# Altium PCB PCB2.PcbDoc
Units mm, origin at the board's own origin, x right, y up, seen from the top; angles counter-clockwise.
Board outline 77 x 49 mm, 2 copper layers (Top Layer, Bottom Layer); 56 components, 52 nets, 226 pads, 40 vias.
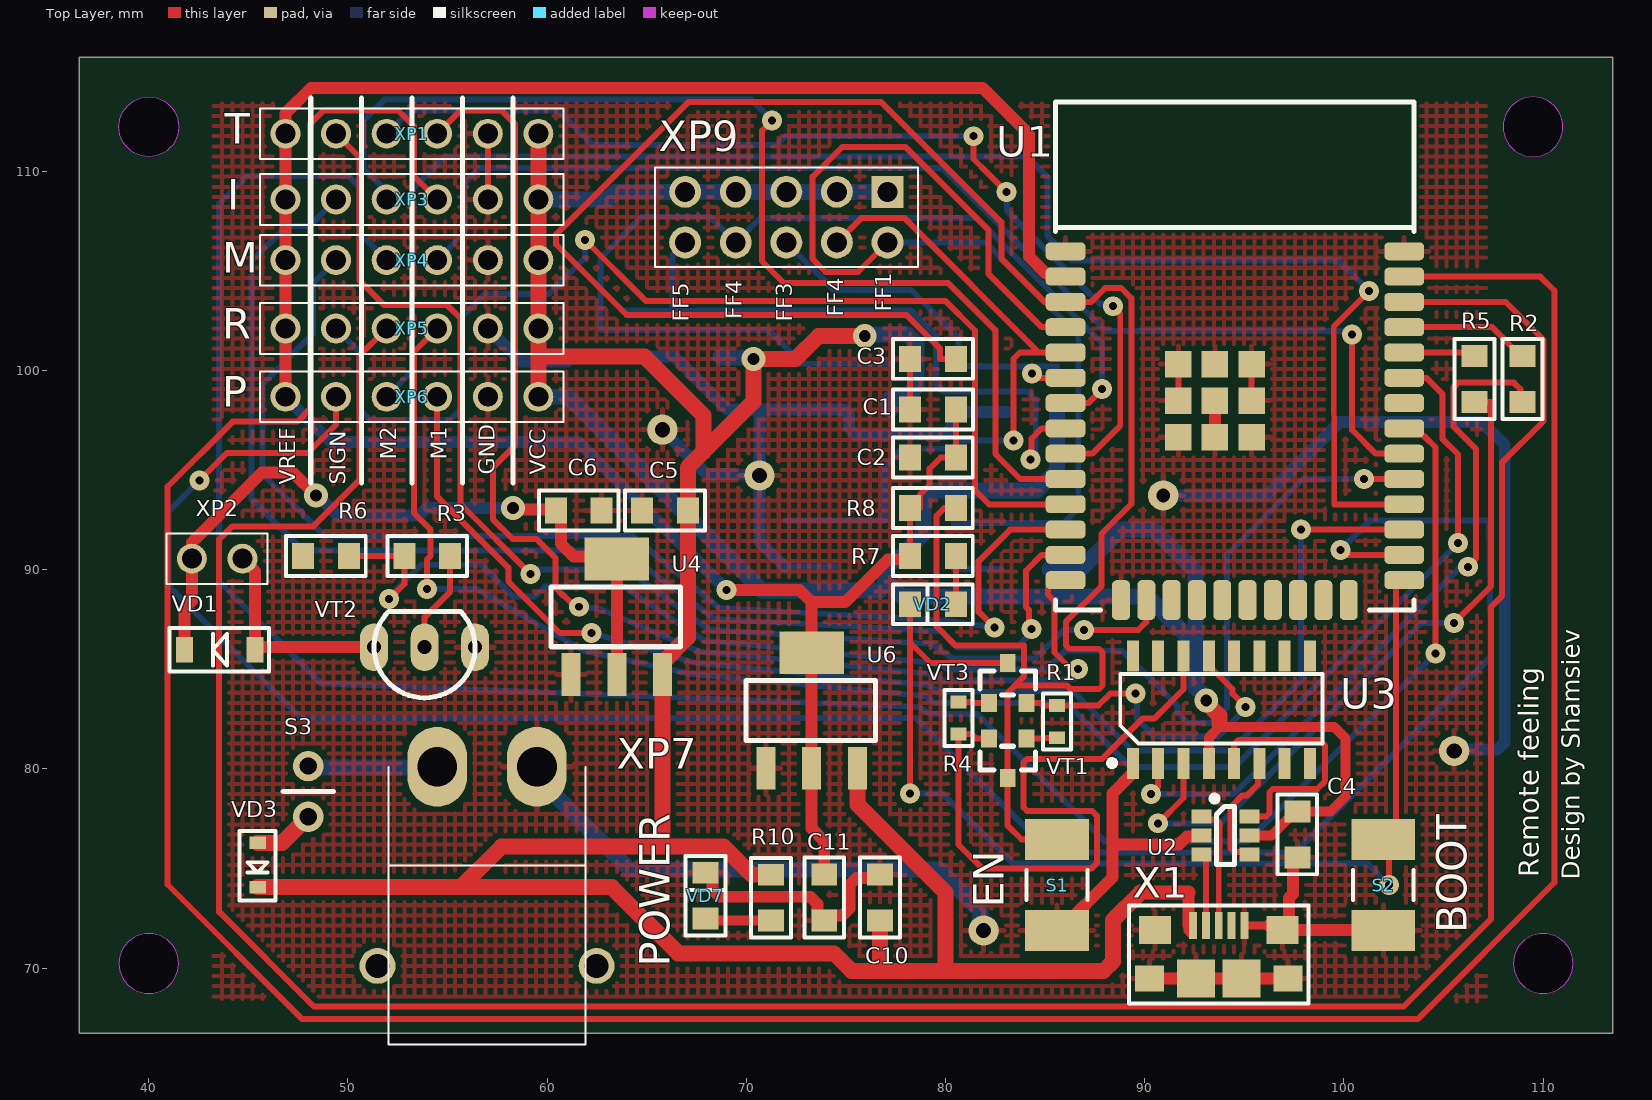
[diagram p0: Top Layer view]
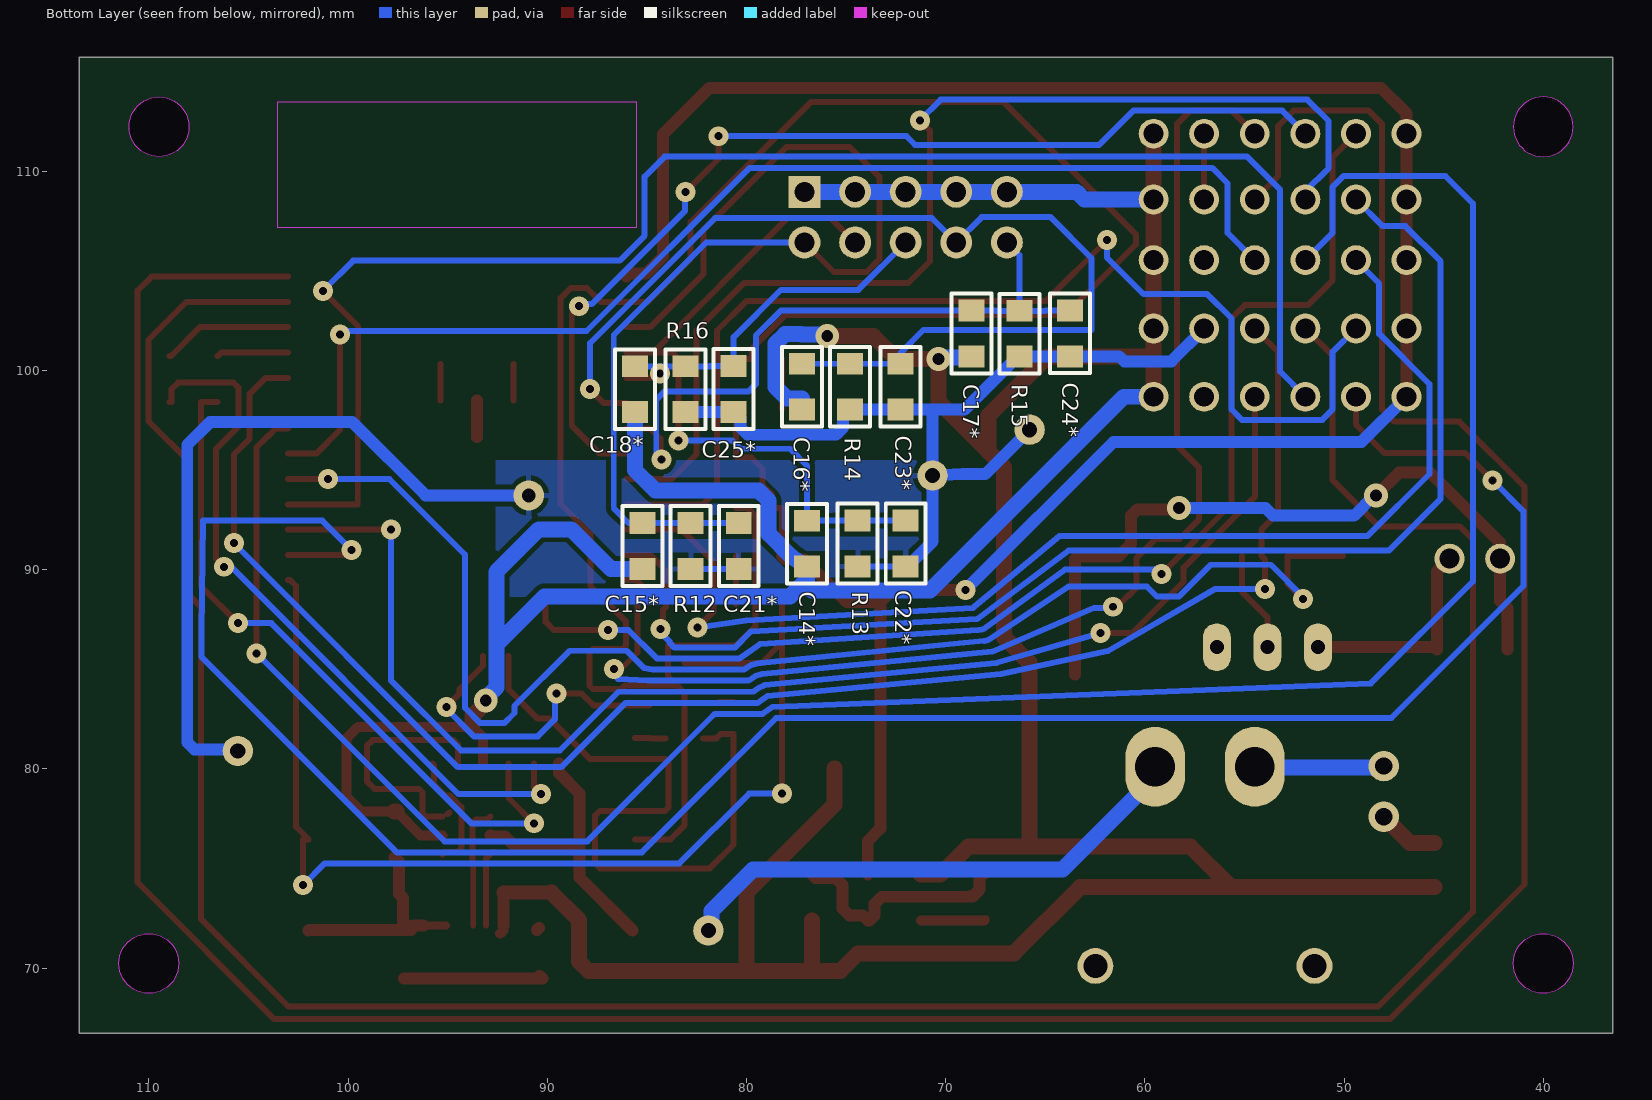
[diagram p1: Bottom Layer view, seen from below]
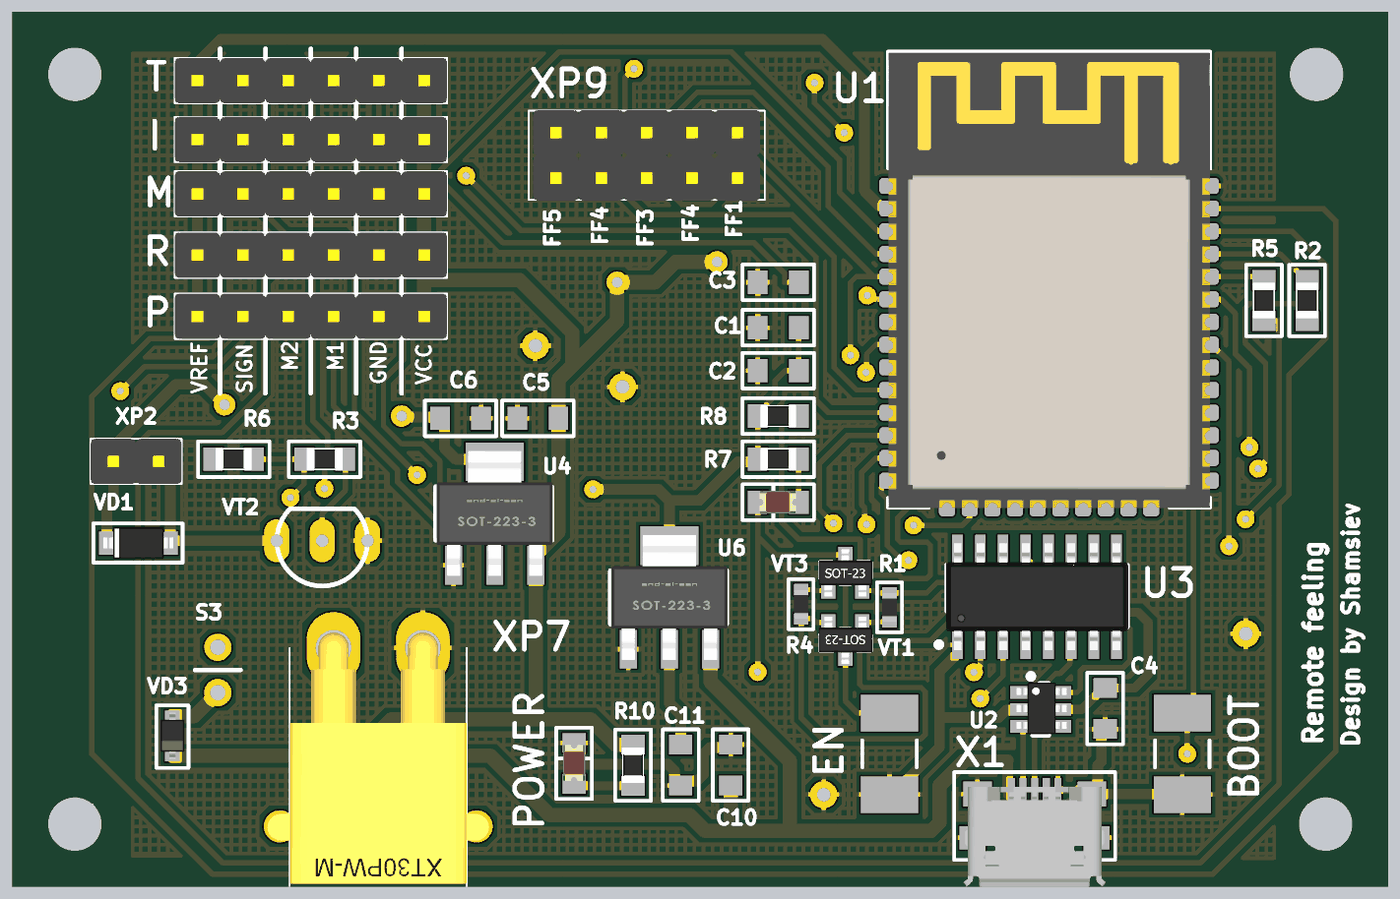
[diagram p2: 3D render of the assembled board from above, using the file's embedded part models]

## Layer stack, top to bottom
Top Solder: solder mask 0.0102, Solder Resist, Dk 3.5
Top Layer: signal copper 0.0356
Dielectric 1: dielectric 0.32, FR-4, Dk 4.8
Bottom Layer: signal copper 0.0356
Bottom Solder: solder mask 0.0102, Solder Resist, Dk 3.5

## Board outline
36.505,66.731 36.505,115.731 113.505,115.731 113.505,66.731
cut-out: 40.005,110.731 cw(c40.005,112.231) 38.505,112.231 cw(c40.005,112.231) 40.005,113.731 cw(c40.005,112.231) 41.505,112.231 cw(c40.005,112.231)
cut-out: 107.997,112.231 ccw(c109.497,112.231) 109.497,110.731 ccw(c109.497,112.231) 110.997,112.231 ccw(c109.497,112.231) 109.497,113.731 ccw(c109.497,112.231)
cut-out: 108.505,70.231 ccw(c110.005,70.231) 110.005,68.731 ccw(c110.005,70.231) 111.505,70.231 ccw(c110.005,70.231) 110.005,71.731 ccw(c110.005,70.231)
cut-out: 38.505,70.231 ccw(c40.005,70.231) 40.005,68.731 ccw(c40.005,70.231) 41.505,70.231 ccw(c40.005,70.231) 40.005,71.731 ccw(c40.005,70.231)

## Design rules (kind name [scope] priority, off if disabled: settings)
Clearance Clearance_1 [All] p1: gap=0.254 ignorepadtopadclearanceinfootprint=TRUE except(0: Arc-Hole Track-Hole SMDPad-Hole THPad-Hole Via-Hole Fill-Hole Poly-Hole Region-Hole Text-Hole)
Clearance [All] p2: gap=0.254 ignorepadtopadclearanceinfootprint=FALSE except(0: Arc-Hole Track-Hole SMDPad-Hole THPad-Hole Via-Hole Fill-Hole Poly-Hole Region-Hole Text-Hole; 0.1: SMDPad-SMDPad)
PolygonConnect [All] p1: connectstyle=Relief reliefconductorwidth=0.254 reliefentries=4 polygonreliefangle="90 Angle" airgapwidth=0.254
RoutingVias [All] p1: holewidth=0.4 width=1 viastyle="Through Hole" minholewidth=0.4 minwidth=0.8 maxholewidth=0.6 maxwidth=1
SolderMaskExpansion [All] p1: expansion=0.102 istentingtop=FALSE
Width Width_3 [InNet('FR1')] p1: maxlimit=1 minlimit=0.5 preferedwidth=0.8
Width Width_4 [All] p2: maxlimit=1 minlimit=0.254 preferedwidth=0.3
Width Width_2 [InNet('BAT')] p3: maxlimit=1 minlimit=0.6 preferedwidth=0.8
Width Width_1 [InNet('3V3')] p4: maxlimit=1 minlimit=0.6 preferedwidth=0.6
Width [InNet('3V')] p5: maxlimit=1 minlimit=0.6 preferedwidth=0.6
30 further rules are at their usual default settings.

## Components (designator, comment, footprint, x,y, rotation, side; value= is the part's Value field where it differs from the comment)
C1 "100uF" C0805 79.375,98.044 r180 top
C2 "100nF" C0805 79.368,95.631 r180 top
C3 "100nF" C0805 79.375,100.584 r180 top
C4 "100nF" C0805 97.663,76.708 r270 top
C5 "10uF" C0805 65.92,92.964 r0 top
C6 "10uF" C0805 61.588,92.964 r180 top
C10 "10uF" C0805 76.708,73.54 r270 top
C11 "10uF" C0805 73.914,73.54 r90 top
C14* "100n" C0805 76.962,91.306 r90 bottom
C15* "100n" C0805 85.217,91.186 r90 bottom
C16* "100n" C0805 77.216,99.187 r90 bottom
C17* "100n" C0805 68.707,101.854 r90 bottom
C18* "100n" C0805 85.598,99.06 r90 bottom
C21* "100n" C0805 80.391,91.186 r270 bottom
C22* "100n" C0805 72.009,91.313 r270 bottom
C23* "100n" C0805 72.263,99.187 r270 bottom
C24* "100n" C0805 63.754,101.861 r270 bottom
C25* "100n" C0805 80.645,99.067 r270 bottom
R1 "10K" R0603 85.598,82.375 r90 top
R2 "470" R0805 108.966,99.568 r90 top
R3 "1K" R0805 53.982,90.678 r180 top
R4 "10K" R0603 80.645,82.55 r270 top
R5 "470" R0805 106.553,99.568 r90 top
R6 "10K" R0805 48.895,90.678 r0 top
R7 "2K" R0805 79.368,90.678 r0 top
R8 "10K" R0805 79.368,93.091 r0 top
R10 "2K" R0805 71.247,73.533 r270 top
R12 "100K" R0805 82.804,91.186 r90 bottom
R13 "100K" R0805 74.422,91.313 r90 bottom
R14 "100K" R0805 74.803,99.187 r90 bottom
R15 "100K" R0805 66.294,101.847 r90 bottom
R16 "100K" R0805 83.058,99.06 r90 bottom
S1 "EN" SW4*3 85.598,74.168 r90 top
S2 "BOOT" SW4*3 101.981,74.168 r90 top
S3 "POWER" Key 46.736,78.867 r270 top
U1 "ESP32-WROOM-32E" ESP32-WROOM-32E 94.529,98.482 r0 top
U2 "USB LC6" SOT-23-6 94.107,76.708 r270 top
U3 "CH340C" SO-16 93.858,83.014 r90 top
U4 "AMS1117" SOT-223 63.5,87.63 r0 top
U6 "AMS1117" SOT-223 73.279,82.931 r0 top
VD1 "1N4148W" SOD-123 45.339,85.979 r180 top
VD2 "/" D0805 79.343,88.265 r180 top
VD3 "B5819WS" SOD-323 45.466,75.184 r270 top
VD7 "POWER" D0805 67.945,73.66 r90 top
VT1 "S8050(NPN)" SOT-23-3 83.124,79.534 r180 top
VT2 "2N7000" TO-92 53.848,86.106 r270 top
VT3 "S8050(NPN)" SOT-23-3 83.124,85.312 r0 top
X1 "47346-0001 (Molex, Micro USB)" microUSB-B 93.719,72.144 r90 top
XP1 "T_SERV1" PLS-6 53.213,111.887 r180 top
XP2 "VIBRO_M" PLS-2 43.434,90.551 r0 top
XP3 "I_SERV2" PLS-6 53.213,108.585 r180 top
XP4 "M_SERV3" PLS-6 53.213,105.537 r180 top
XP5 "R_SERV4" PLS-6 53.213,102.108 r180 top
XP6 "P_SERV5" PLS-6 53.213,98.679 r180 top
XP7 "XT30PW-M" XT30PW-M 56.984,75.104 r180 top
XP9 "FInger_force" PLD-10 72.009,107.696 r270 top

## Footprints (in the part's own frame and the unit in brackets; to place one, negate y for a bottom-side part, rotate by r counter-clockwise, add the part's x,y. Pads: shape width x height; smd on the part's side, far side on the other; paste and mask are expansions set on the pad)
C0805 [mm]
  rect 1.1x1.3 smd: 1(-1.15,0) 2(1.15,0)
  silkscreen extent -2,-1 2,1, body extent -1,-0.62 1,0.63, height 0.7
D0805 [mm]
  rect 1.1x1.3 smd: 1(-1.175,0) 2(1.125,0)
  silkscreen extent -2.02,-1 1.98,1, body extent -1.01,-0.62 1.01,0.62, height 1.1
ESP32-WROOM-32E [mm] "PCB ANTENNA - 38 PIN"
  rrect50% 2x0.9 smd: 1(-8.5,7.5) 2(-8.5,6.23) 3(-8.5,4.96) 4(-8.5,3.69) 5(-8.5,2.42) 6(-8.5,1.15) 7(-8.5,-0.12) 8(-8.5,-1.39) 9(-8.5,-2.66) 10(-8.5,-3.93) 11(-8.5,-5.2) 12(-8.5,-6.47) 13(-8.5,-7.74) 14(-8.5,-9.01) 25(8.5,-9.01) 26(8.5,-7.74) 27(8.5,-6.47) 28(8.5,-5.2) 29(8.5,-3.93) 30(8.5,-2.66) 31(8.5,-1.39) 32(8.5,-0.12) 33(8.5,1.15) 34(8.5,2.42) 35(8.5,3.69) 36(8.5,4.96) 37(8.5,6.23) 38(8.5,7.5)
  rrect50% 0.9x2 smd: 15(-5.715,-10.01) 16(-4.445,-10.01) 17(-3.175,-10.01) 18(-1.905,-10.01) 19(-0.635,-10.01) 20(0.635,-10.01) 21(1.905,-10.01) 22(3.175,-10.01) 23(4.445,-10.01) 24(5.715,-10.01)
  rect 1.33x1.33 smd: 39(-2.835,-1.835) 39(-2.835,0) 39(-2.835,1.835) 39(-1,-1.835) 39(-1,0) 39(-1,1.835) 39(0.835,-1.835) 39(0.835,0) 39(0.835,1.835)
  Keep-Out Layer region: -9,8.69 9,8.69 9,15 -9,15
  silkscreen extent -9,-10.5 9,15, body extent -9,-10.54 9,14.96, height 3.2
Key [mil]
  round 60 hole 33.94: 1(-50,50) 2(50,50)
  silkscreen extent 0,0 0,100
microUSB-B [mm]
  rect 1.35x0.4 smd paste+0: 1(0,1.3) 2(0,0.65) 3(0,0) 4(0,-0.65) 5(0,-1.3)
  rect 1.3x1.45 smd paste+0: 6(-2.675,3.475) 6(-2.675,-3.475)
  rect 1.9x1.9 smd paste+0: 6(-2.675,-1.15)
  rect 1.9x1.9 smd: 6(-2.675,1.15)
  rect 1.4x1.6 smd paste+0: 6(-0.225,3.2) 6(-0.225,-3.2)
  silkscreen extent -3.93,-4.5 1,4.5, body extent -5.43,-4 0.18,4, height 2.74
PLD-10 [mm]
  rect 1.6x1.6 hole 1: 1(-1.27,5.08)
  round 1.6 hole 1: 2(1.27,5.08) 3(-1.27,2.54) 4(1.27,2.54) 5(-1.27,0) 6(1.27,0) 7(-1.27,-2.54) 8(1.27,-2.54) 9(-1.27,-5.08) 10(1.27,-5.08)
  silkscreen extent -2.5,-6.6 2.5,6.6, body extent -2.54,-6.35 2.54,6.35, height 8.54
PLS-2 [mm]
  round 1.5 hole 1: 1(-1.27,0) 2(1.27,0)
  silkscreen extent -2.54,-1.27 2.54,1.27, body extent -2.54,-1.27 2.54,1.27, height 8.54
PLS-6 [mm]
  round 1.5 hole 1: 1(-6.35,0) 2(-3.81,0) 3(-1.27,0) 4(1.27,0) 5(3.81,0) 6(6.35,0)
  silkscreen extent -7.62,-1.27 7.62,1.27, body extent -7.62,-1.27 7.62,1.27, height 8.54
R0603 [mm]
  rect 0.65x0.8 smd: 1(-0.815,0) 2(0.81,0)
  silkscreen extent -1.4,-0.7 1.4,0.7, body extent -0.8,-0.4 0.8,0.4, height 0.47
R0805 [mm]
  rect 1.1x1.3 smd: 1(-1.15,0) 2(1.15,0)
  silkscreen extent -2,-1 2,1, body extent -1,-0.62 1,0.62, height 0.5
SO-16 [mm]
  rect 1.55x0.6 smd: 1(-2.75,4.45) 2(-2.75,3.18) 3(-2.75,1.91) 4(-2.75,0.64) 5(-2.75,-0.63) 6(-2.75,-1.9) 7(-2.75,-3.17) 8(-2.75,-4.44) 9(2.65,-4.44) 10(2.65,-3.17) 11(2.65,-1.9) 12(2.65,-0.63) 13(2.65,0.64) 14(2.65,1.91) 15(2.65,3.18) 16(2.65,4.45)
  silkscreen extent -2.87,-5.08 1.75,5.65, body extent -3.05,-5.1 2.95,5.1, height 1.7
SOD-123 [mm] "SOD-123 diode package"
  rect 0.85x1.3 smd: 1(0,0) 2(3.55,0)
  silkscreen extent -0.7,-1.1 4.3,1.1, body extent -0.18,-0.9 3.72,0.9, height 1.18
SOD-323 [mm]
  rect 0.63x0.83 smd: 1(-1.1,0) 2(1.125,0)
  silkscreen extent -1.7,-0.9 1.8,0.9, body extent -1.3,-0.68 1.3,0.68, height 1.1
SOT-23-3 [mm]
  rect 0.8x0.9 smd: 1(-0.95,-2) 2(0.95,-2) 3(0,0)
  silkscreen extent -1.4,-1.6 1.4,-0.4, body extent -1.5,-2.32 1.5,0.32, height 1.08
SOT-23-6 [mm]
  rect 0.7x1 smd: 1(-0.9,-1.25) 2(0.05,-1.25) 3(1,-1.25) 4(1,1.15) 5(0.05,1.15) 6(-0.9,1.15)
  silkscreen extent -1.95,-0.75 1.5,0.4, body extent -1.45,-1.4 1.45,1.4, height 1.45
SOT-223 [mm]
  rect 0.95x2.15 smd: 1(-2.3,-2.9) 2(0,-2.9) 3(2.3,-2.9)
  rect 3.25x2.15 smd: 2(0,2.9)
  silkscreen extent -3.3,-1.5 3.2,1.5, body extent -3.25,-3.5 3.25,3.5, height 1.7
SW4*3 [mm]
  rect 2.05x3.2 smd: 1(-2.286,0) 2(2.286,0)
  silkscreen extent -0.76,-1.52 0.76,1.52, body extent -2.5,-1.5 2.5,1.5, height 1
TO-92 [mm]
  oval 2.4x1.4 hole 0.7: 1(0,2.54) 2(0,0) 3(0,-2.54)
  silkscreen extent -1.8,-2.54 2.54,2.54
XT30PW-M [mm]
  oval 3x4 hole 2: 1(-2.5,-5) 2(2.5,-5)
  round 1.8 hole 1.2: K1(-5.5,5) K2(5.5,5)
  silkscreen extent -4.95,-5 4.95,8.95, body extent -6.2,-5.85 6.2,8.2, height 5.01

## Part data
C1 C2 C3 C4 C5 C6 C10 C11 C14* C15* C16* C17* C18* C21* C22* C23* C24* C25*: library part Cap
R1 R2 R3 R4 R5 R6 R7 R8 R10 R12 R13 R14 R15 R16: library part res
S1 S2 S3: library part Key
U1: "PCB Antenna - 4,8,16 MB Flash - WiFi - BT - MCU", Manufacturer_Name="Espressif Systems", ComponentLink1Description=Datasheet, ComponentLink1URL=https://www.espressif.com/sites/default/files/documentation/esp32-wroom-32e_esp32-wroom-32ue_datasheet_en.pdf, ComponentLink2Description="SoC Datasheet", ComponentLink2URL=https://www.espressif.com/sites/default/files/documentation/esp32_datasheet_en.pdf, ComponentLink3Description=Devkit, ComponentLink3URL=https://www.espressif.com/en/products/devkits/esp32-devkitc
VD1: library part VD
VD2 VD7: library part Led
VD3: library part "Schottky diode"
VT1 VT3: library part npn
VT2: library part "MOSFET (N-Channel)"
XP1 XP3 XP4 XP5 XP6: library part PLS-6, "PLS-6"
XP2: library part PLS-2, "PLS-2"
XP9: library part PLD-10, "PLD-10"

## Free pads (board coordinates)
  round 1.524 hole 0.7: 2(90.932,93.726)
  round 1.524 hole 0.762: 6(65.786,97.028) 7(70.658,94.725) 8(105.537,80.899) 10(81.915,71.882)

## Via types
v1: diameter 1, hole 0.4, Top Layer to Bottom Layer, 35 vias
v2: diameter 1.2, hole 0.6, Top Layer to Bottom Layer, 5 vias

## Nets (pads, with @x,y where several pads share a name; then routed paths per layer and width w, separated by ;. In a path a pad name is that pad's centre, name@x,y a point inside that pad or via, vN(x,y) a via of type N, cw(c..) or ccw(c..) an arc to the next point about the centre after c; other vN are vias at no path point)
3V: C6.2 U4.2 VD1.2 XP2.1 | length 37.1
  Top Layer w0.6: VD1.2 41.789,88.062 42.164,88.437 XP2.1 42.164,91.359 45.674,94.869 47.244,94.869 v2(48.387,93.726) ; v2(58.293,93.091) 58.356,93.027 60.374,93.027 60.688,92.714 60.688,91.31 61.326,90.672 63.358,90.672 63.5,90.53 U4.2@63.5,84.73
  Bottom Layer w0.6: v2(48.387,93.726) 48.476,93.726 49.492,92.71 53.559,92.71 53.94,93.091 v2(58.293,93.091)
3V3: C1.1 C2.1 C11.2 R7.1 R8.1 U1.2 U6.2 XP1.6 XP3.6 XP4.6 XP5.6 XP6.6 | length 120.8
  Top Layer w0.3: R7.1 R8.1 78.715,93.091 78.715,93.751 79.197,94.234 79.197,95.072 79.756,95.631 C2.1 80.518,96.825 80.525,96.832 C1.1
  Top Layer w0.6: XP6.6 XP5.6 XP4.6 XP3.6 XP1.6 46.863,112.903 48.151,114.191 81.859,114.191 84.201,111.849 84.201,105.708 85.047,104.862 85.879,104.862 U1.2 ; v1(69.005,88.983) 72.663,88.983 73.279,88.367 74.964,88.367 77.119,90.522 78.062,90.522 R7.1 ; 73.279,88.138 73.279,85.831 73.279,80.031 73.279,77.008 73.914,76.373 C11.2
  Bottom Layer w0.6: XP6.6 49.124,96.418 61.57,96.418 v1(69.005,88.983)
+12: 
BAT: S3.1 XP7.2 | length 6.6
  Bottom Layer w0.8: S3.1 48.071,80.072 54.508,80.072 XP7.2@54.523,80.057
DTR: R1.2 U3.13 VT3.2 | length 16.9
  Top Layer w0.3: VT3.2 84.76,83.312 84.887,83.185 87.679,83.185 88.271,83.777 v1(89.535,83.777) ; U3.13 93.218,85.189 94.401,84.006 94.401,83.794 95.052,83.143 v1(95.052,83.101)
  Bottom Layer w0.3: v1(89.535,83.777) 89.621,83.691 89.621,82.489 90.475,81.636 93.685,81.636 95.052,83.002 v1(95.052,83.101)
EN: C3.1 R8.2 S1.2 U1.3 VT1.3 | length 111.3
  Top Layer w0.3: R8.2 79.934,93.091 79.553,92.71 79.553,87.147 80.518,86.182 83.947,86.182 83.947,84.643 83.48,84.176 ; C3.1 79.731,100.584 79.731,101.092 78.029,102.794 63.983,102.794 60.452,106.324 60.452,106.832 67.107,113.487 76.759,113.487 82.804,107.442 82.804,105.601 84.963,103.442 U1.3 87.313,103.442 88.011,104.14 88.824,104.14 89.332,103.632 89.332,93.294 87.833,91.796 87.833,89.169 86.04,87.376 86.04,86.206 86.216,86.03 87.706,86.03 87.884,85.852 87.884,84.174 87.708,83.998 86.284,83.998 86.106,84.176 83.48,84.176 ; S1.2 83.82,76.454 83.124,77.15 VT1.3 83.124,83.82 83.48,84.176
FF1: C15*.2 C21*.1 R12.2 U1.4 XP9.2 | length 53.9
  Top Layer w0.3: XP9.2 75.606,104.943 73.975,104.943 73.33,105.588 73.33,109.728 74.828,111.227 77.982,111.227 82.169,107.039 82.169,104.839 84.836,102.172 U1.4
  Bottom Layer w0.3: XP9.2 82.021,106.426 86.665,101.782 86.665,93.079 85.922,92.336 C15*.2 R12.2 C21*.1
FF2: C14*.2 C22*.1 R13.2 U1.5 XP9.4 | length 35
  Top Layer w0.3: XP9.4 75.768,107.645 77.947,107.645 84.69,100.902 ; v1(83.414,96.495) 83.414,100.584 83.732,100.902 84.69,100.902 ; U1.5 84.69,100.902
  Bottom Layer w0.3: C22*.1 R13.2 75.667,92.463 75.674,92.456 C14*.2 76.962,95.225 77.807,96.07 80.303,96.07 80.728,96.495 v1(83.414,96.495)
FF3: C18*.2 C25*.1 R16.2 U1.6 XP9.6 | length 19.3
  Top Layer w0.3: v1(84.353,99.847) 84.569,99.632 U1.6
  Bottom Layer w0.3: XP9.6 74.385,104.05 78.271,104.05 80.645,101.676 C25*.1 81.839,100.217 81.846,100.21 R16.2 84.716,100.21 ; v1(84.353,99.847) 84.716,100.21 ; C18*.2 84.716,100.21
FF4: C16*.2 C23*.1 R14.2 U1.7 XP9.8 | length 53.3
  Top Layer w0.3: U1.7 87.161,98.362 v1(87.859,99.06)
  Bottom Layer w0.3: C16*.2 R14.2 C23*.1 72.263,100.889 71.12,102.032 62.687,102.032 62.687,105.649 64.734,107.696 68.199,107.696 XP9.8 70.688,107.645 81.585,107.645 87.859,101.371 v1(87.859,99.06)
FF5: C17*.2 C24*.1 R15.2 U1.8 XP9.10 | length 33.9
  Top Layer w0.3: v1(84.277,95.529) 84.328,95.58 84.328,96.584 84.836,97.092 U1.8
  Bottom Layer w0.3: C24*.1 64.999,103.011 65.013,102.997 R15.2 ; XP9.10 66.294,105.791 R15.2 ; v1(84.277,95.529) 84.531,95.783 84.531,98.527 84.125,98.933 79.908,98.933 79.527,99.314 79.527,101.752 78.276,103.004 C17*.2 67.495,103.004 67.488,102.997 R15.2
FR1: C4.1 C5.2 C10.2 C14*.1 C15*.1 C16*.1 C17*.1 C18*.1 R10.1 U2.5 U3.4 U4.3 U6.3 VD3.2 X1.1 XP1.1 XP3.1 XP4.1 XP5.1 XP6.1 XP9.1 XP9.3 XP9.5 XP9.7 XP9.9 | length 256.9
  Top Layer w0.5: 92.202,72.144 92.202,71.886 X1.1@92.365,71.723 ; U3.4 93.218,81.565 93.75,82.097 99.513,82.097 100.076,81.534 100.076,78.613 99.321,77.858 C4.1 ; U2.5 96.363,76.658 C4.1@97.563,77.858
  Top Layer w0.6: 92.202,72.144 92.202,73.787
  Top Layer w0.7: 89.789,73.787 92.202,73.787
  Top Layer w0.8: VD3.2 55.669,74.059 ; XP6.1 59.563,100.711 ; XP1.1 XP3.1 XP4.1 XP5.1 59.563,100.711 ; R10.1 70.282,74.683 68.866,76.098 65.8,76.098 ; U6.3 75.579,78.218 80.01,73.787 80.01,70.104 80.264,69.85 ; v2(75.946,101.727) 73.625,101.727 72.482,100.584 v2(70.358,100.584) 70.358,98.425 67.847,95.914 ; C10.2 76.708,69.85 ; 89.789,73.787 88.4,72.398 88.4,70.319 87.931,69.85 80.264,69.85 ; v2(93.091,83.439) 93.091,83.331 93.75,82.672 93.75,82.247 ; C4.1@97.563,77.858 C4.1 ; 55.669,74.059 63.253,74.059 66.573,70.739 74.401,70.739 75.29,69.85 76.708,69.85 ; 55.669,74.059 57.709,76.098 65.8,76.098 ; 59.563,100.711 64.886,100.711 67.847,97.75 67.847,95.914 ; 65.8,76.098 U4.3 65.8,85.33 67.07,86.6 C5.2 67.07,95.137 67.847,95.914 ; 76.708,69.85 80.264,69.85
  Bottom Layer w0.8: XP6.1 61.062,98.679 70.782,88.959 76.708,88.959 76.962,89.213 76.962,89.51 ; XP3.1 63.043,108.585 63.424,108.966 XP9.9 XP9.7 XP9.5 XP9.3 XP9.1 ; C17*.1 68.767,100.644 70.298,100.644 v2(70.358,100.584) ; v2(75.946,101.727) 76.023,101.804 77.243,101.804 77.268,101.829 78.068,101.829 78.537,101.36 78.537,99.162 77.978,98.603 77.216,98.603 C16*.1 ; C15*.1 86.81,90.036 88.798,92.024 90.424,92.024 92.558,89.891 92.558,86.233 ; C18*.1 85.598,94.996 84.582,93.98 79.4,93.98 78.892,93.472 78.892,91.796 77.749,90.653 C14*.1 76.962,89.51 ; v2(93.091,83.439) 93.091,83.547 92.558,84.081 92.558,86.233 ; 76.962,89.51 77.826,88.646 90.145,88.646 92.558,86.233
GND: C1.2 C2.2 C3.2 C4.2 C5.1 C6.1 C10.1 C11.1 C21*.2 C22*.2 C23*.2 C24*.2 C25*.2 pad.2 pad.6 pad.7 pad.8 pad.10 R12.1 R13.1 R14.1 R15.1 R16.1 S1.1 S2.1 U1.1 U1.15 U1.38 U1.39 U2.2 U3.1 U4.1 U6.1 VD7.2 VT2.1 X1.5 X1.6 XP1.2 XP3.2 XP4.2 XP5.2 XP6.2 XP7.1 | length 168.7
  Top Layer w0.3: XP3.2 XP1.2 ; C1.2 C3.2 ; U1.39@91.694,98.482 U1.39@91.694,100.317 ; U1.39@95.364,98.482 U1.39@95.364,100.317
  Top Layer w0.4: X1.5@95.096,72.144 X1.6@96.221,72.144
  Top Layer w0.6: VD7.2 68.045,74.785 68.295,74.535 68.295,73.94 68.646,73.589 68.824,73.589 68.834,73.579 73.213,73.579 73.564,73.228 73.564,72.64 73.814,72.39 C11.1 74.164,72.64 74.833,72.64 75.184,72.991 75.184,74.172 75.535,74.523 76.541,74.523 C10.1 ; S1.1@85.725,71.882 88.392,74.549 88.392,76.2 ; U3.1 89.408,79.789 88.392,78.773 88.392,76.2 ; X1.6@90.381,69.607 90.244,69.469 X1.6@97.194,69.469 ; X1.6@90.424,72.014 X1.6@90.519,71.919 ; U2.2 92.811,76.612 92.128,76.612 91.716,76.2 88.392,76.2 ; U1.39@93.529,96.647 U1.39@93.529,98.482 ; X1.6@96.221,72.144 X1.6@96.621,72.144 ; C4.2 97.455,75.35 97.455,73.727 97.246,73.519 97.246,72.319 X1.6@96.883,71.955 ; S2.1 101.944,71.919 96.919,71.919 X1.6@96.883,71.955 ; X1.6@96.621,72.144 96.694,72.144 X1.6@96.883,71.955 ; X1.6@96.621,72.144 96.846,71.919 X1.6@96.883,71.955
  Bottom Layer w0.3: C22*.2 R13.1 ; C21*.2 R12.1
  Bottom Layer w0.6: XP5.2 58.674,100.457 61.037,100.457 61.291,100.711 C24*.2 63.761,100.704 66.287,100.704 R15.1 66.394,100.697 69.054,98.037 70.658,98.037 ; pad.6 68.022,94.792 69.165,94.792 pad.7 ; C22*.2 71.909,90.163 70.658,91.413 pad.7 ; R16.1 81.846,97.91 81.839,97.917 C25*.2 80.545,97.917 80.295,97.667 80.295,97.125 79.944,96.774 75.504,96.774 75.153,97.125 75.153,97.787 74.903,98.037 R14.1 C23*.2 70.658,98.037 ; pad.2 96.109,93.726 99.797,97.414 106.929,97.414 108.077,96.266 108.077,81.326 107.726,80.975 105.613,80.975 pad.8 ; pad.7 70.658,98.037
  Bottom Layer w0.8: XP7.1@59.523,80.057 59.523,79.557 64.14,74.94 79.678,74.94 81.75,72.867 81.75,72.047 pad.10
IE: U1.13 XP3.5 | length 65.1
  Top Layer w0.3: v1(84.313,87.02) 84.199,87.135 84.199,87.97 84.049,88.12 84.049,89.955 84.836,90.742 U1.13
  Bottom Layer w0.3: XP3.5 48.063,107.245 46.92,107.245 45.155,105.48 45.155,93.554 47.74,90.969 63.826,90.969 68.321,87.585 68.388,87.538 68.43,87.525 79.785,86.886 79.821,86.849 80.584,86.087 83.623,86.087 83.835,86.299 83.835,86.353 84.313,86.831 v1(84.313,87.02)
IM1: U1.37 XP3.3 | length 165.8
  Top Layer w0.3: XP3.3 53.315,109.753 53.315,112.268 52.542,113.041 48.768,113.041 48.084,112.357 48.084,98.044 47.474,97.434 44.216,97.434 40.945,94.163 40.945,74.193 47.701,67.437 103.708,67.437 110.574,74.303 110.574,104.006 109.868,104.712 U1.37
IM2: U1.10 XP3.4 | length 56.5
  Top Layer w0.3: v1(71.298,112.547) 70.79,112.039 70.79,105.486 71.893,104.383 80.137,104.383 82.499,102.021 82.499,95.809 83.756,94.552 U1.10
  Bottom Layer w0.3: XP3.4 51.943,108.991 50.775,110.16 50.775,112.522 51.848,113.595 70.25,113.595 v1(71.298,112.547)
IO0: S2.2 U1.25 VD2.2 VT3.3 | length 56.9
  Top Layer w0.3: v1(78.218,78.754) 78.218,86.342 ; VD2.2 78.218,86.342 ; VT3.3 79.248,85.312 78.218,86.342 ; v1(102.26,74.168) 102.26,76.454 S2.2 102.616,77.089 102.616,89.178 102.91,89.472 U1.25
  Bottom Layer w0.3: v1(78.218,78.754) 79.869,78.754 83.368,75.255 101.174,75.255 v1(102.26,74.168)
ME: U1.12 XP4.5 | length 60.3
  Top Layer w0.3: v1(82.459,87.086) 81.661,87.884 81.661,90.424 83.249,92.012 U1.12
  Bottom Layer w0.3: XP4.5 48.235,104.369 48.235,101.84 45.709,99.314 45.709,94.804 48.819,91.694 64.287,91.694 68.547,88.148 68.631,88.079 80.014,87.44 82.429,87.086 v1(82.459,87.086)
MM1: U1.30 XP4.3 | length 60.7
  Top Layer w0.3: v1(100.406,101.803) 100.406,97.016 101.6,95.822 U1.30
  Bottom Layer w0.3: XP4.3 55.855,106.909 55.855,109.398 56.627,110.17 79.843,110.17 88.031,101.983 100.227,101.983 v1(100.406,101.803)
MM2: U1.31 XP4.4 | length 113.2
  Top Layer w0.3: U1.31 103.62,97.092 104.036,96.676 104.065,96.676 104.597,96.143 v1(104.597,85.801)
  Bottom Layer w0.3: XP4.4 50.571,106.909 50.571,109.22 50.038,109.753 44.907,109.753 43.536,108.382 43.536,89.408 48.655,84.289 78.697,83.104 79.207,82.763 79.298,82.763 81.593,82.763 81.681,82.675 87.993,76.363 95.159,76.363 v1(104.597,85.801)
NetC9_1: 
NetC12_1: 
NetL1_2: 
NetR1_1: R1.1 VT1.1 | length 1.5
  Top Layer w0.3: VT1.1 84.811,81.534 84.837,81.56 R1.1
NetR2_2: R2.2 U1.35 | length 6.5
  Top Layer w0.3: U1.35 107.44,102.172 108.894,100.718 R2.2
NetR3_1: R3.1 VT2.2 | length 5.1
  Top Layer w0.3: VT2.2 53.848,87.616 55.132,88.9 R3.1
NetR4_1: R4.1 VT3.1 | length 1.6
  Top Layer w0.3: R4.1 81.382,83.365 81.435,83.312 VT3.1
NetR5_2: R5.2 U1.34 | length 3.6
  Top Layer w0.3: U1.34 106.369,100.902 R5.2
NetR7_2: R7.2 VD2.1 | length 2.4
  Top Layer w0.3: VD2.1 R7.2
NetR9_1: 
NetR10_2: R10.2 VD7.1 | length 3.3
  Top Layer w0.3: VD7.1 VD7.1@68.047,72.383
  Top Layer w0.5: VD7.1@68.047,72.383 R10.2
NetS3_2: S3.2 VD3.1 | length 3.1
  Top Layer w0.8: VD3.1 46.693,76.284 S3.2
NetU2_1: U2.1 X1.3 | length 6.2
  Top Layer w0.3: U2.1 93.015,77.45 93.585,77.45 93.761,77.274 93.761,75.191 93.719,75.149 X1.3
NetU2_3: U2.3 X1.2 | length 4
  Top Layer w0.3: U2.3@92.603,75.835 92.742,75.835 93.069,75.508 X1.2
NetU2_4: U2.4 U3.6 | length 6.1
  Top Layer w0.3: U2.4 95.137,75.828 94.491,75.828 94.315,76.004 94.315,78.087 94.901,78.673 95.141,78.673 95.689,79.222 95.689,80.195 U3.6
NetU2_6: U2.6 U3.5 | length 12.8
  Top Layer w0.3: U3.5 94.488,81.231 94.7,81.443 98.77,81.443 99.063,81.15 99.063,79.382 98.674,78.994 96.445,78.994 96.269,78.818 96.269,77.784 96.093,77.608 U2.6 ; U2.6@94.907,77.808 94.98,77.735 U2.6@95.003,77.735
NetU5_14: 
NetU5_15: 
NetVD1_1: VD1.1 VT2.3 XP2.2 | length 10.8
  Top Layer w0.6: XP2.2 45.339,89.916 VD1.1@45.339,86.106 ; VD1.1 VD1.1@45.339,86.106 ; VT2.3 VD1.1@45.339,86.106
PE: U1.26 XP6.5 | length 109.6
  Top Layer w0.3: v1(42.547,94.486) 43.92,95.86 47.981,95.86 49.403,97.282 XP6.5 ; v1(99.822,90.983) 100.063,90.742 U1.26
  Bottom Layer w0.3: v1(42.547,94.486) 40.996,92.935 40.996,89.179 47.625,82.55 78.511,82.55 85.253,75.809 97.551,75.809 107.373,85.631 107.373,86.866 ccw(c107.073,86.866) 107.373,86.87 107.29,92.456 101.295,92.456 v1(99.822,90.983)
PM1: U1.27 XP6.3 | length 67.4
  Top Layer w0.3: XP6.3 54.483,93.668 58.051,90.1 58.051,89.408 60.642,86.817 v1(62.23,86.817) ; v1(97.854,92.012) U1.27
  Bottom Layer w0.3: v1(62.23,86.817) 67.443,85.321 79.1,84.204 79.359,84.076 79.666,83.871 86.423,83.871 89.371,80.923 94.329,80.923 97.854,84.448 v1(97.854,92.012)
PM2: U1.28 XP6.4 | length 79.2
  Top Layer w0.3: v1(101.27,103.988) 99.492,102.21 99.517,93.282 U1.28
  Bottom Layer w0.3: XP6.4 53.213,99.949 53.213,109.082 54.864,110.733 84.11,110.733 85.115,109.728 85.115,106.768 86.372,105.512 99.746,105.512 v1(101.27,103.988)
RE: U1.11 XP5.5 | length 57.4
  Top Layer w0.3: v1(61.9,106.553) 64.973,103.48 80.01,103.48 81.483,102.006 81.483,93.98 82.181,93.282 U1.11
  Bottom Layer w0.3: XP5.5 50.571,100.94 50.571,98.044 51.09,97.525 55.132,97.525 55.651,98.044 55.651,102.616 56.871,103.835 60.071,103.835 61.9,105.664 v1(61.9,106.553)
RM1: U1.33 XP5.3 | length 82.9
  Top Layer w0.3: v1(53.975,89.027) 53.975,90.519 54.153,90.697 54.153,91.999 53.315,92.837 53.315,100.94 XP5.3 ; U1.33 104.14,99.632 104.945,98.827 104.945,96.579 105.74,95.784 v1(105.74,91.338)
  Bottom Layer w0.3: v1(53.975,89.027) 56.478,89.027 56.548,88.987 61.856,85.913 67.223,84.762 78.934,83.65 79.129,83.523 79.437,83.317 86.071,83.317 89.301,80.086 94.488,80.086 v1(105.74,91.338)
RM2: U1.36 XP5.4 | length 140.7
  Top Layer w0.3: XP5.4 50.571,100.736 50.571,94.488 48.26,92.177 44.196,92.177 43.536,91.516 43.536,72.822 48.285,68.072 102.997,68.072 107.391,72.466 107.391,88.132 107.945,88.686 107.945,95.385 110.02,97.46 110.02,101.537 108.115,103.442 U1.36
RTS: R4.2 U3.14 VT1.2 | length 34.4
  Top Layer w0.3: VT1.2 81.511,81.534 81.305,81.74 R4.2 80.645,76.2 81.839,75.006 87.347,75.006 87.602,75.262 87.602,77.646 87.365,77.883 84.104,77.883 83.928,78.059 83.928,80.329 84.104,80.504 87.87,80.504 89.882,82.516 90.473,82.516 91.948,83.991 U3.14
RX: R5.1 U3.3 | length 35.2
  Top Layer w0.3: v1(90.678,77.267) 91.948,78.537 U3.3 ; v1(105.525,87.313) 107.391,89.179 107.391,98.418 R5.1
  Bottom Layer w0.3: v1(90.678,77.267) 93.81,77.267 103.856,87.313 v1(105.525,87.313)
TE: U1.16 XP1.5 | length 62.1
  Top Layer w0.3: XP1.5 50.571,110.719 50.571,104.521 51.816,103.276 54.991,103.276 55.651,102.616 55.651,93.294 v1(59.157,89.789) ; v1(86.944,86.97) 89.678,86.97 90.084,87.376 U1.16
  Bottom Layer w0.3: v1(59.157,89.789) 59.37,90.002 64.003,90.002 68.093,87.028 68.188,86.984 68.348,86.971 79.316,86.272 80.355,85.533 84.492,85.533 84.579,85.621 85.928,86.97 v1(86.944,86.97)
TM1: U1.14 XP1.3 | length 64
  Top Layer w0.3: XP1.3 55.637,113.041 57.723,113.041 58.395,112.37 58.395,96.241 57.277,95.123 57.277,92.534 58.265,91.546 59.456,91.546 60.427,90.576 60.427,89.078 60.808,88.696 60.847,88.696 61.406,88.138 v1(61.595,88.138) ; U1.14 85.52,89.472 85.145,89.098 85.145,88.748 85.471,88.422 85.471,85.842 86.299,85.014 v1(86.655,85.014)
  Bottom Layer w0.3: v1(61.595,88.138) 61.656,88.077 62.545,88.077 67.656,85.887 79.228,84.758 79.291,84.742 79.545,84.659 79.896,84.425 84.95,84.425 86.448,84.513 86.655,84.72 v1(86.655,85.014)
TM2: U1.9 XP1.4 | length 52.1
  Top Layer w0.3: v1(81.407,111.76) 81.407,110.617 82.126,109.898 v1(83.058,108.966) ; U1.9 87.364,95.822 88.773,97.231 88.773,102.87 v1(88.417,103.226)
  Bottom Layer w0.3: XP1.4 53.097,113.041 60.579,113.041 62.292,111.328 71.539,111.328 71.971,111.76 v1(81.407,111.76) ; v1(83.058,108.966) 83.084,108.94 83.084,108.016 87.774,103.326 88.317,103.326 v1(88.417,103.226)
TX: R2.1 U3.2 | length 36.3
  Top Layer w0.3: v1(90.322,78.74) 90.678,79.096 U3.2 ; v1(106.223,90.145) 106.644,90.566 106.644,96.048 105.499,97.193 105.499,99.135 105.754,99.39 108.534,99.39 108.864,99.06 108.864,98.418 R2.1
  Bottom Layer w0.3: v1(90.322,78.74) 94.463,78.74 105.867,90.145 v1(106.223,90.145)
VIBRO_M: R3.2 R6.2 U1.29 | length 70.5
  Top Layer w0.3: R6.2 R3.2 52.832,89.281 v1(52.07,88.519) ; v1(101.004,94.552) U1.29
  Bottom Layer w0.3: v1(52.07,88.519) 52.07,88.646 53.67,90.246 56.693,90.246 58.293,88.646 59.392,88.646 59.9,89.154 63.833,89.154 67.867,86.467 67.94,86.448 68.065,86.43 79.297,85.312 79.479,85.29 79.762,85.221 80.125,84.979 84.721,84.979 85.153,85.067 86.015,85.928 88.88,85.928 91.65,83.159 91.65,82.804 92.158,82.296 93.368,82.296 94.132,83.061 94.132,90.754 97.93,94.552 v1(101.004,94.552)
pads on no net: R6.1 U1.17 U1.18 U1.19 U1.20 U1.21 U1.22 U1.23 U1.24 U1.32 U3.7 U3.8 U3.9 U3.10 U3.11 U3.12 U3.15 U3.16 X1.4 XP7.K1 XP7.K2

## Polygon pours and split planes (outlines as drawn)
GND on Bottom Layer "GND_L02_P001" (solid, pour order 1): 92.583,95.504 70.993,95.504 70.993,88.646 92.583,88.646
GND on Top Layer "GND_L01_P000" (hatched 90Degree grid 0.508 track 0.203, pour order 0): 107.124,68.324 107.124,113.411 43.243,113.411 43.243,68.453

## Silkscreen, mask and mechanical layers (free items; w line width, h text height)
Top Overlay:
  lines w0.254: 48.133,94.361 48.133,113.665 ; 50.673,94.361 50.673,113.665 ; 53.213,94.361 53.213,113.665 ; 55.753,94.361 55.753,113.665 ; 58.293,94.361 58.293,113.665
  text "T" at 43.815,111.379 h1.52
  text "I" at 43.942,108.077 h1.52
  text "M" at 43.688,104.902 h1.52
  text "FF1" at 77.27,102.943 h0.8 r90
  text "FF4" at 74.857,102.689 h0.8 r90
  text "FF4" at 69.777,102.562 h0.8 r90
  text "FF5" at 67.11,102.435 h0.8 r90
  text "FF3" at 72.317,102.435 h0.8 r90
  text "R" at 43.688,101.6 h1.52
  text "P" at 43.688,98.171 h1.52
  text "M2" at 52.428,95.527 h0.8 r90
  text "M1" at 54.968,95.527 h0.8 r90
  text "GND" at 57.381,94.765 h0.8 r90
  text "VCC" at 59.921,94.765 h0.8 r90
  text "VREF" at 47.348,94.257 h0.8 r90
  text "SIGN" at 49.888,94.257 h0.8 r90
  text "Remote feeling" at 109.776,74.549 h1 r90
  text "Design by Shamsiev" at 111.841,74.422 h0.9 r90
Mechanical 1:
  circle w0.254: c109.982,70.231 r1.5
  circle w0.254: c109.497,112.231 r1.5
  circle w0.254: c40.005,70.231 r1.5
  circle w0.254: c40.005,112.231 r1.5
  lines w0.254: 36.505,66.731 113.505,66.731 113.505,115.731 36.505,115.731 36.505,66.731